# EAGLE board untitled (EAGLE 7.2.0)
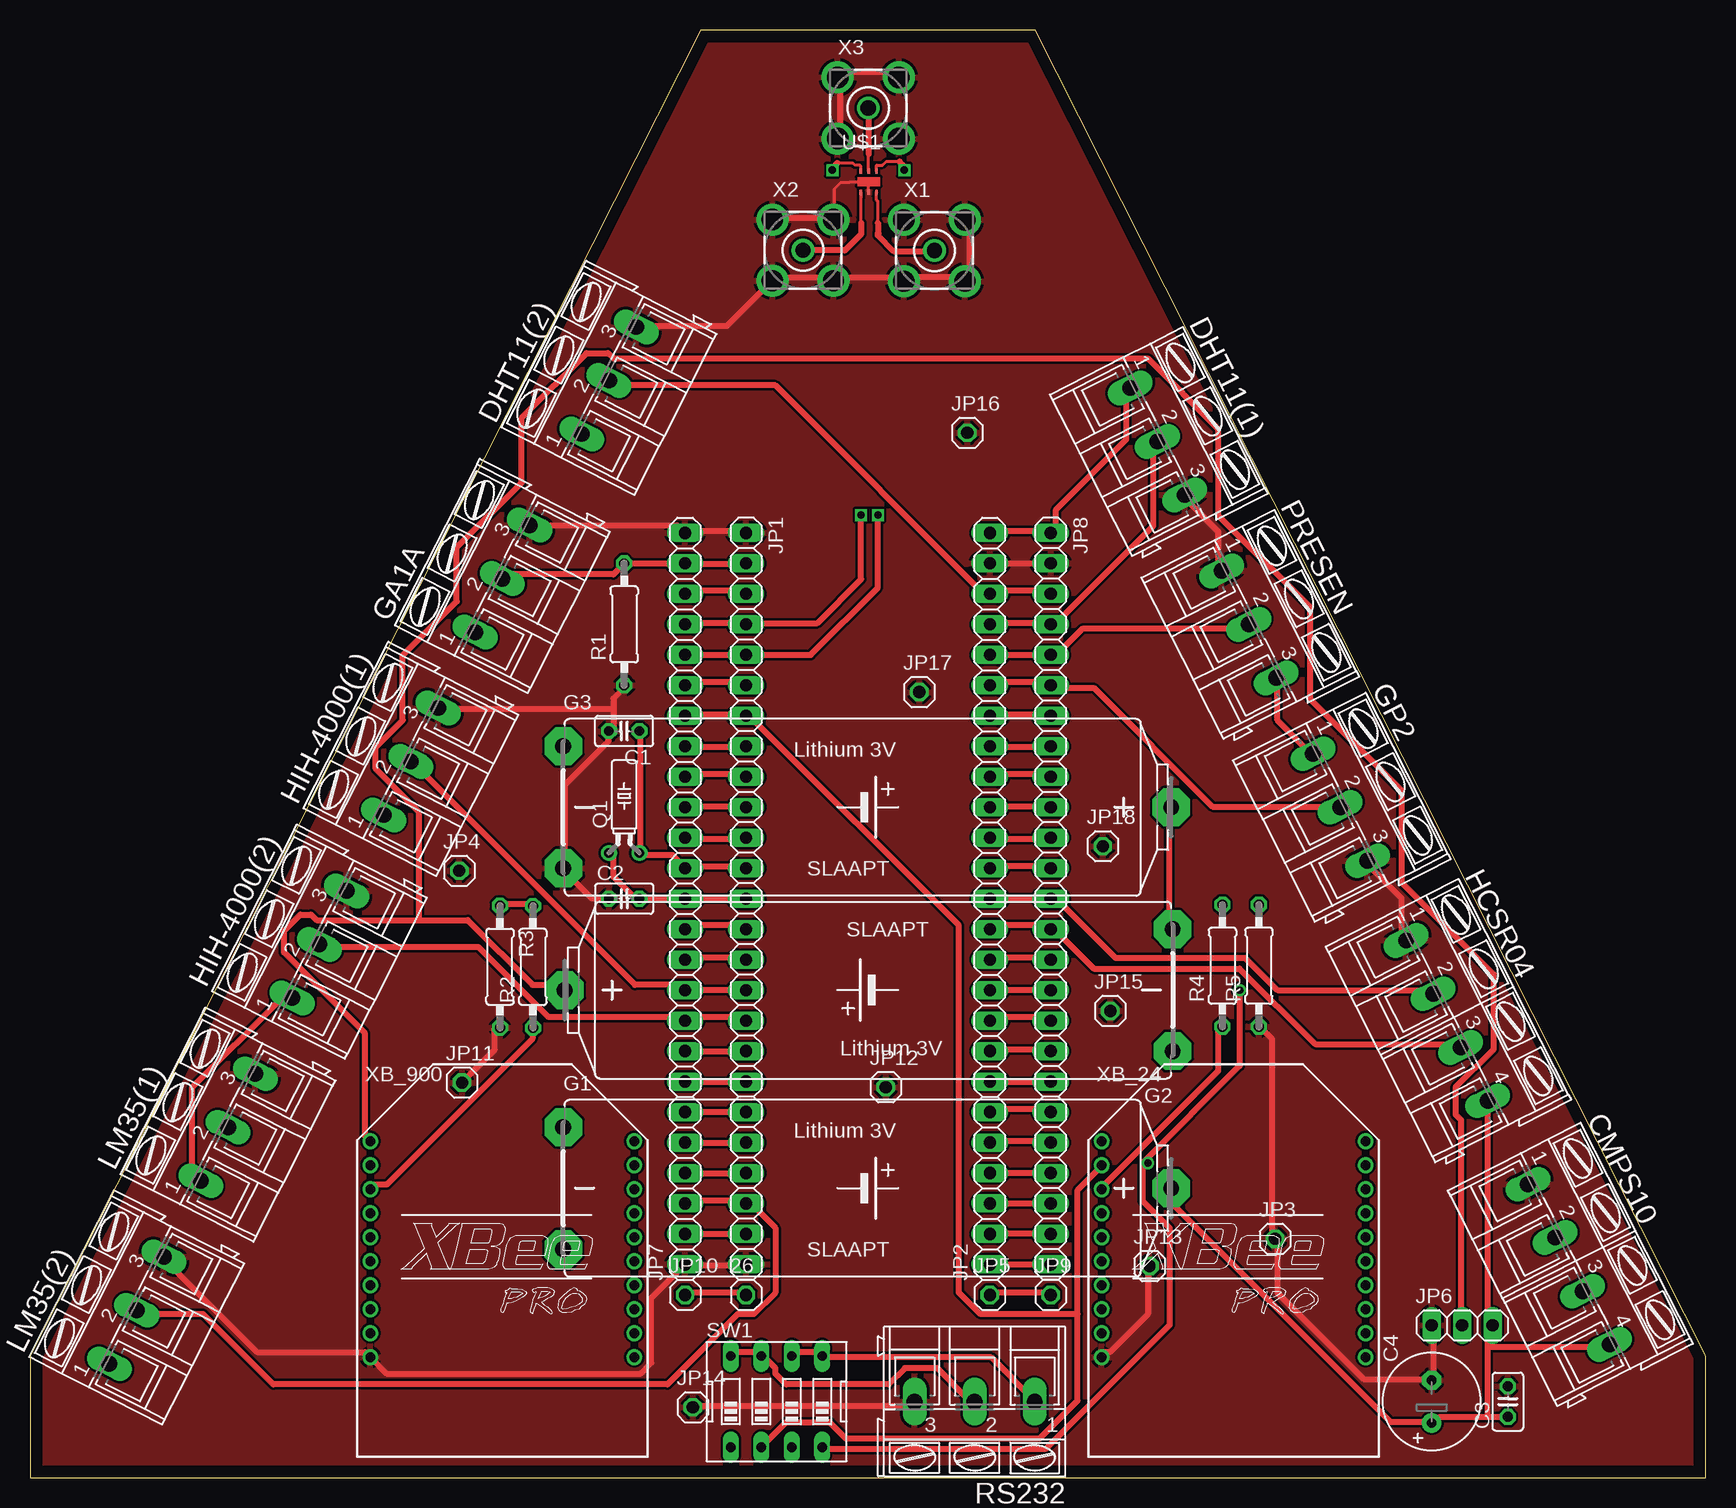
[diagram p0: board, top side]
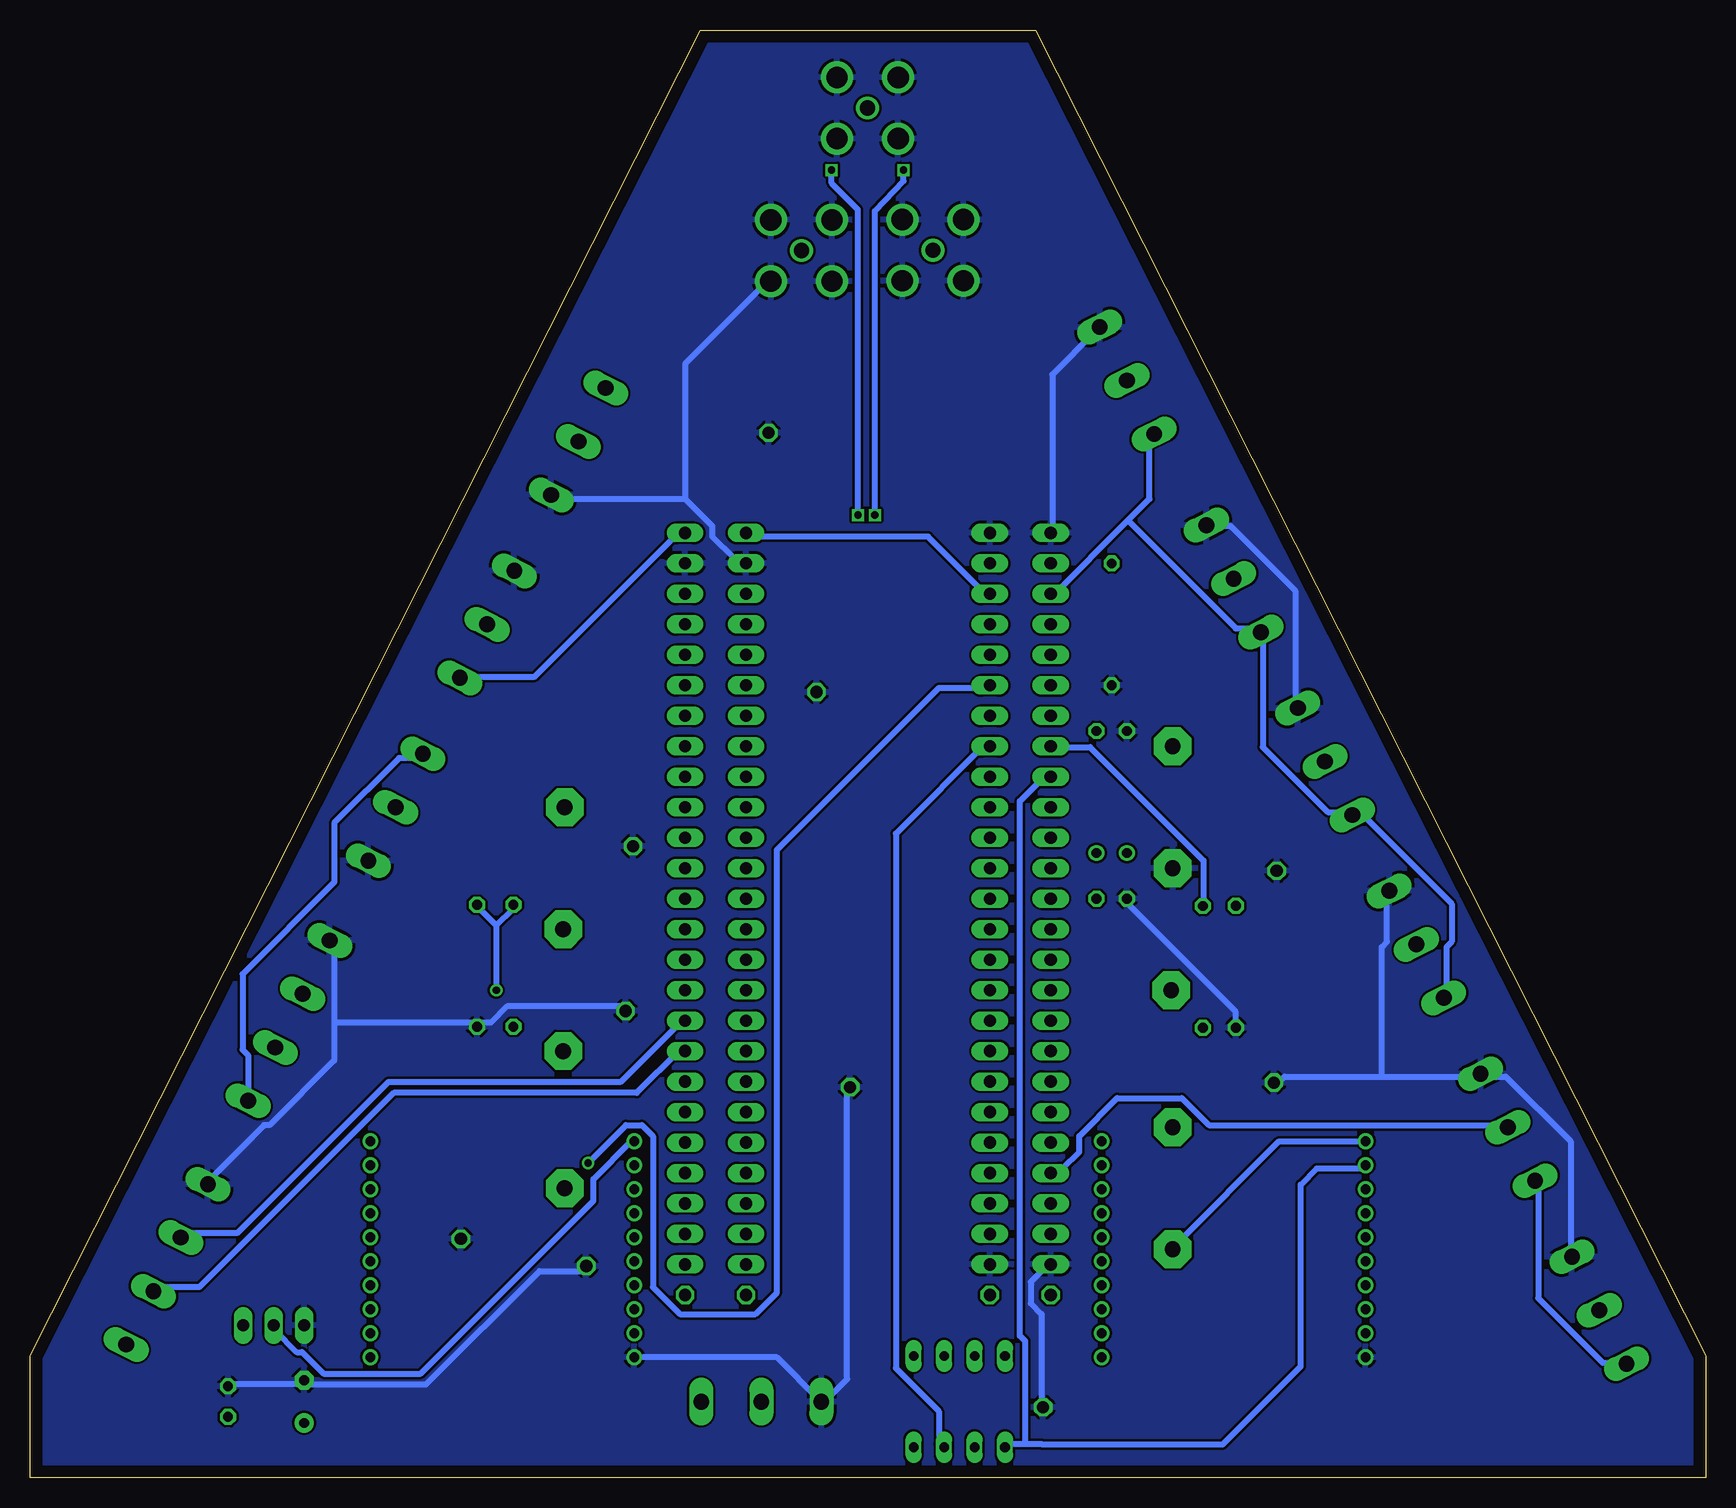
[diagram p1: board, bottom side, seen from below]

Size 139.7 x 120.65 mm. Coordinates in mm from the lower left corner, seen from the top.
Outline: 0,0 139.68,0 139.7,10.16 83.82,120.65 55.88,120.65 0,10.16 0,0
Copper layers (1*16): Top 0.035mm / dielectric 1.5mm / Bottom 0.035mm
Design rules "default": minimum track width 10mil, minimum drill 24mil, track to track 8mil, track to pad 8mil, pad to pad 8mil, via to via 8mil, smd to smd 8mil, copper to edge 40mil, drill to drill 8mil, minimum pad ring 10mil, minimum via ring 8mil, stop-mask expansion 4mil, vias tented up to drill 0mil, thermal gap 10mil

## Footprints (pad centres in the part's own frame; a part is rotated, then mirrored left to right if it is on the bottom)
1X01 = drill 1.016 octagon: 1 0,0
C025-025X050 = drill 0.813 octagon: 1 -1.27,0; 2 1.27,0
E3,5-8 = drill 0.813 pad 1.6: + -1.778,0 | drill 0.813 pad 1.6 octagon: - 1.778,0
AK300/4 = drill 1.321 long: 1 -7.493,0; 2 -2.515,0; 3 2.515,0; 4 7.493,0
AK300/3 = drill 1.321 long: 1 -5.004,0; 2 0,0; 3 5.004,0
SL-160AA/PT = drill 1.321 pad 3.15 octagon: + 25.273,0; - -25.4,-5.08; -@1 -25.4,5.08
1X25 = drill 1.016 long: 1 -29.21,0; 2 -26.67,0; 3 -24.13,0; 4 -21.59,0; 5 -19.05,0; 6 -16.51,0; 7 -13.97,0; 8 -11.43,0; 9 -8.89,0; 10 -6.35,0; 11 -3.81,0; 12 -1.27,0; 13 1.27,0; 14 3.81,0; 15 6.35,0; 16 8.89,0; 17 11.43,0; 18 13.97,0; 19 16.51,0; 20 19.05,0; 21 21.59,0; 22 24.13,0; 23 26.67,0; 24 29.21,0; 25 31.75,0
1X03 = drill 1.016 long: 1 -2.54,0; 2 0,0; 3 2.54,0
TC26H = drill 0.813: 1 -1.27,0; 2 1.27,0
0207/10 = drill 0.813 octagon: 1 -5.08,0; 2 5.08,0
EDG-04 = drill 0.813 long: 1 -3.81,-3.81; 2 -1.27,-3.81; 3 1.27,-3.81; 4 3.81,-3.81; 5 3.81,3.81; 6 1.27,3.81; 7 -1.27,3.81; 8 -3.81,3.81
SO70-6SPDT = smd 0.203 x 0.406: 1 -0.55,-0.85; 2 0.1,-0.85; 3 0.75,-0.85; 4 0.75,0.9; 5 0.1,0.9; P$6 -0.55,0.9
BU-SMA-V = drill 1.27: 1 0,0 | drill 1.778: 2 -2.55,2.55; 3 2.55,2.55; 4 2.55,-2.55; 5 -2.55,-2.55
XBEE-PRO = drill 0.8 pad 1.27: 1 -11,9; 2 -11,7; 3 -11,5; 4 -11,3; 5 -11,1; 6 -11,-1; 7 -11,-3; 8 -11,-5; 9 -11,-7; 10 -11,-9; 11 11,-9; 12 11,-7; 13 11,-5; 14 11,-3; 15 11,-1; 16 11,1; 17 11,3; 18 11,5; 19 11,7; 20 11,9

## Placement (x,y rotation side)
26  [1X01]  59.69,15.24 0 top
C1  10  [C025-025X050]  49.53,62.23 180 top
C2  10  [C025-025X050]  49.53,48.26 0 top
C3  [C025-025X050]  123.19,6.35 90 top
C4  [E3,5-8]  116.84,6.35 90 top
CMPS10  [AK300/4]  128.27,17.78 297 top
DHT11(1)  [AK300/3]  93.98,86.36 297 top
DHT11(2)  [AK300/3]  48.26,91.44 63 top
G1  SL-160AA/PT  [SL-160AA/PT]  69.85,24.13 0 top
G2  SL-160AA/PT  [SL-160AA/PT]  69.85,40.64 180 top
G3  SL-160AA/PT  [SL-160AA/PT]  69.85,55.88 0 top
GA1A  [AK300/3]  39.37,74.93 63 top
GP2  [AK300/3]  109.22,55.88 297 top
HCSR04  [AK300/4]  118.11,38.1 297 top
HIH-4000(1)  [AK300/3]  31.75,59.69 63 top
HIH-4000(2)  [AK300/3]  24.13,44.45 63 top
JP1  [1X25]  59.69,49.53 270 top
JP2  [1X25]  80.01,46.99 90 top
JP3  [1X01]  103.79,19.91 0 top
JP4  [1X01]  35.78,50.58 0 top
JP5  [1X01]  80.01,15.24 0 top
JP6  [1X03]  119.38,12.7 0 top
JP7  [1X25]  54.61,46.99 90 top
JP8  [1X25]  85.09,49.53 270 top
JP9  [1X01]  85.09,15.24 0 top
JP10  [1X01]  54.61,15.24 0 top
JP11  [1X01]  36.01,32.93 0 top
JP12  [1X01]  71.34,32.56 0 top
JP13  [1X01]  93.33,17.64 0 top
JP14  [1X01]  55.25,5.88 0 top
JP15  [1X01]  90.05,38.9 0 top
JP16  [1X01]  78.13,87.08 0 top
JP17  [1X01]  74.13,65.48 0 top
JP18  [1X01]  89.43,52.63 0 top
LM35(1)  [AK300/3]  16.51,29.21 63 top
LM35(2)  [AK300/3]  8.89,13.97 63 top
PRESEN  [AK300/3]  101.6,71.12 297 top
Q1  [TC26H]  49.53,52.07 0 top
R1  [0207/10]  49.53,71.12 90 top
R2  [0207/10]  41.93,42.57 90 top
R3  [0207/10]  39.18,42.59 270 top
R4  [0207/10]  99.4,42.67 90 top
R5  [0207/10]  102.44,42.67 90 top
RS232  [AK300/3]  78.74,6.35 180 top
SW1  [EDG-04]  62.23,6.35 0 top
U$1  SPDT  [SO70-6SPDT]  69.81,107.99 0 top
X1  BU-SMA-V  [BU-SMA-V]  75.39,102.27 0 top
X2  BU-SMA-V  [BU-SMA-V]  64.43,102.3 0 top
X3  BU-SMA-V  [BU-SMA-V]  69.88,114.15 0 top
XB_24  XBEE-PRO  [XBEE-PRO]  100.33,19.05 0 top
XB_900  XBEE-PRO  [XBEE-PRO]  39.37,19.05 0 top

## Library data of the parts
26 JP1-JP18 = pinhead
C1-C4 = rcl
CMPS10 DHT11(1) DHT11(2) GA1A GP2 HCSR04 HIH-4000(1) HIH-4000(2) LM35(1) LM35(2) PRESEN RS232 = con-ptr500; OC_FARNELL: unknown; OC_NEWARK: unknown
G1-G3 = battery
Q1 = crystal; OC_FARNELL: unknown; OC_NEWARK: unknown
R1-R5 = resistor
SW1 = special
U$1 = so70-6
X1-X3 = con-coax; OC_FARNELL: unknown; OC_NEWARK: unknown
XB_24 XB_900 = maxstream; MPN: XBP24-AWI-001; OC_FARNELL: 1337916; OC_NEWARK: 42M2667

## Nets
+3V3: G1.- G2.+ JP6.2 XB_24.1 XB_900.1
GND: C1.2 C2.1 C3.2 C4.- CMPS10.1 DHT11(1).3 DHT11(2).3 G3.- GA1A.3 GP2.3 HCSR04.1 HIH-4000(1).3 HIH-4000(2).3 JP1.1 JP1.25 JP2.24 JP3.1 JP4.1 JP6.1 JP7.1 JP7.25 JP8.2 JP11.1 JP12.1 JP13.1 JP14.1 JP15.1 JP16.1 JP17.1 JP18.1 LM35(1).3 LM35(2).3 PRESEN.1 R1.1 R3.2 R5.1 RS232.3 U$1.2 X1.2 X1.3 X1.4 X1.5 X2.2 X2.3 X2.4 X2.5 X3.2 X3.3 X3.4 X3.5 XB_24.10 XB_900.10
N$1: JP1.23 JP7.3 LM35(2).2
N$2: JP1.22 JP7.4 LM35(1).2
N$3: HIH-4000(2).2 JP1.17 JP7.9
N$4: CMPS10.2 JP2.9 JP8.17
N$5: GA1A.2 JP1.2 JP7.24 R1.2
N$6: C1.1 JP1.12 JP7.14 Q1.2
N$7: CMPS10.3 JP2.8 JP8.18
N$8: GP2.2 JP2.20 JP8.6
N$9: HCSR04.2 JP2.13 JP8.13
N$10: DHT11(2).2 JP2.23 JP8.3
N$11: DHT11(1).2 JP2.22 JP8.4
N$12: JP2.21 JP8.5 PRESEN.2
N$13: JP1.9 JP7.17 SW1.1 XB_900.2
N$14: HCSR04.3 JP2.12 JP8.14
N$15: JP1.8 JP7.18 R2.2 R3.1 SW1.3
N$16: JP1.6 JP7.20 R4.2 R5.2 SW1.4
N$17: JP1.7 JP7.19 SW1.2 XB_24.2
N$18: RS232.1 SW1.5 SW1.6
N$19: RS232.2 SW1.7 SW1.8
N$20: HIH-4000(1).2 JP1.16 JP7.10
N$21: G2.- G3.+
N$22: JP1.4 JP7.22 U$1.P$6
N$23: C2.2 JP1.13 JP7.13 Q1.1
N$24: 26.1 JP10.1
N$25: JP5.1 JP9.1
N$26: JP1.24 JP7.2
N$27: JP1.20 JP7.6
N$28: JP1.21 JP7.5
N$29: JP1.19 JP7.7
N$30: JP1.18 JP7.8
N$31: JP2.1 JP8.25
N$32: JP2.4 JP8.22
N$33: JP2.3 JP8.23
N$34: JP2.2 JP8.24
N$35: JP2.5 JP8.21
N$36: JP2.6 JP8.20
N$37: JP2.7 JP8.19
N$38: JP2.10 JP8.16
N$39: JP2.11 JP8.15
N$40: JP1.15 JP7.11
N$41: JP1.14 JP7.12
N$42: JP1.10 JP7.16
N$43: JP1.11 JP7.15
N$44: JP2.19 JP8.7
N$45: JP2.18 JP8.8
N$46: JP2.17 JP8.9
N$47: JP2.16 JP8.10
N$48: JP2.15 JP8.11
N$49: JP2.14 JP8.12
N$50: JP1.5 JP7.21 U$1.4
N$51: R2.1 XB_900.3
N$52: R4.1 XB_24.3
N$53: U$1.1 X2.1
N$54: U$1.3 X1.1
N$55: U$1.5 X3.1
VCC: C3.1 C4.+ CMPS10.4 DHT11(1).1 DHT11(2).1 G1.+ GA1A.1 GP2.1 HCSR04.4 HIH-4000(1).1 HIH-4000(2).1 JP1.3 JP2.25 JP6.3 JP7.23 JP8.1 LM35(1).1 LM35(2).1 PRESEN.3

## Tracks (layer width: path | path; a pad name or v marks a point on that pad's centre or on a via)
+3V3
  Top 0.5: 32.43,46.48 23.88,46.48 23.43,46.93 22.53,46.93 21.18,45.58 21.18,43.78 27.93,37.03 27.93,28.48 XB_900.1 | 32.43,46.48 36.48,46.48 41.88,41.08 44.13,41.08 G2.+ | 32.43,46.48 32.43,55.48 28.83,59.08 28.83,60.88 31.08,63.13 31.08,68.53 35.58,73.03 35.58,77.53 40.98,82.93 40.98,88.33 46.38,93.73 48.18,93.73 48.63,93.28 93.18,93.28 99.03,87.43 99.03,80.23 106.68,72.58 106.68,64.93 114.33,57.28 114.33,49.63 121.98,41.98 121.98,35.68 118.83,32.53 118.83,30.28 119.28,29.83 119.28,12.73 JP6.2
  Bottom 0.5: XB_24.1 89.58,28.03 92.73,24.88 92.73,23.08 107.13,8.68 115.23,8.68 117.03,10.48 117.48,10.48 119.28,12.28 JP6.2 | XB_900.1 28.38,28.03 35.58,28.03 44.13,19.48 G1.-
GND
  Top 0.254: U$1.2 69.91,107.95 69.88,107.98 68.38,107.98 68.33,107.93 67.58,107.93 67.03,107.38 67.03,104.9 X2.3
  Top 0.5: 59.43,17.68 54.93,17.68 JP7.1 54.48,17.68 51.78,14.98 51.78,9.58 50.88,8.68 29.73,8.68 28.38,10.03 XB_900.10 27.93,10.48 18.93,10.48 11.28,18.13 LM35(2).3 | XB_24.10 89.58,10.48 90.03,10.48 93.18,13.63 93.18,17.23 JP13.1 | JP14.1 55.38,5.98 73.38,5.98 RS232.3 | HCSR04.1 114.33,45.13 114.33,48.28 111.63,50.98 GP2.3 | JP6.1 117.03,12.28 117.03,8.23 C4.- 116.58,8.23 111.18,8.23 103.98,15.43 103.98,19.48 JP3.1 103.53,19.93 103.53,36.58 102.63,37.48 R5.1 | C2.1 48.18,48.28 46.83,48.28 44.58,50.53 G3.- 44.58,50.98 44.58,57.73 48.18,61.33 48.18,62.23 C1.2 48.63,62.23 48.63,64.03 | 48.63,64.03 48.63,64.93 49.53,65.83 R1.1 | 48.63,64.03 34.23,64.03 HIH-4000(1).3 | R3.2 38.73,37.48 38.73,35.68 36.03,32.98 JP11.1 | JP2.24 80.13,76.18 85.08,76.18 JP8.2 | PRESEN.1 99.03,75.73 99.03,78.88 96.33,81.58 DHT11(1).3 | JP1.1 59.43,78.88 54.93,78.88 JP7.25 54.48,78.88 54.03,79.33 41.88,79.33 GA1A.3 | 72.93,104.53 X1.2 | X1.3 78.33,104.53 78.33,100.03 X1.4 77.88,100.03 72.93,100.03 X1.5 72.48,100.03 67.08,100.03 X2.4 66.63,100.03 62.13,100.03 X2.5 61.68,99.58 58.08,95.98 50.88,95.98 DHT11(2).3 | 72.03,111.73 X3.4 | X3.3 72.03,117.13 67.53,117.13 X3.2 67.53,116.68 67.53,111.73 X3.5 | X2.2 62.13,104.98 66.63,104.98 X2.3 | 67.08,104.53 X2.3 | 67.08,104.98 X2.3
  Bottom 0.5: JP14.1 55.38,5.98 55.38,13.63 56.28,14.53 56.28,16.33 54.93,17.68 JP7.1 | JP12.1 71.58,32.53 71.58,8.23 73.38,6.43 RS232.3 73.83,6.43 77.43,10.03 89.13,10.03 XB_24.10 | 114.33,37.93 114.33,44.68 HCSR04.1 | 114.33,37.93 114.33,34.78 119.73,29.38 120.18,29.38 124.68,24.88 CMPS10.1 | C3.2 122.88,7.78 117.03,7.78 C4.- 116.58,7.78 106.68,7.78 97.23,17.23 93.63,17.23 JP13.1 | JP15.1 90.48,39.28 99.93,39.28 101.28,37.93 102.18,37.93 R5.1 102.63,37.93 114.33,37.93 | 27.03,33.43 35.13,33.43 35.58,32.98 JP11.1 | 27.03,33.43 18.93,33.43 LM35(1).3 18.48,33.43 16.68,33.43 11.28,28.03 11.28,18.58 LM35(2).3 | 27.03,33.43 27.03,44.23 26.58,44.68 26.58,48.73 HIH-4000(2).3 | C2.1 48.18,47.83 39.18,38.83 39.18,37.93 R3.2 | 85.08,81.58 82.83,79.33 82.83,78.43 81.03,76.63 80.13,76.63 JP2.24 | 85.08,81.58 95.88,81.58 DHT11(1).3 | JP7.25 54.48,78.88 54.48,91.93 50.88,95.53 DHT11(2).3 | 85.08,81.58 85.08,92.83 78.33,99.58 X1.4 | HIH-4000(1).3 34.23,64.48 34.23,73.93 39.63,79.33 41.43,79.33 GA1A.3
  pour Top: -0.02,10.18 -0.02,0.03 139.68,0.03 139.68,10.13 83.88,120.68 55.83,120.68 -0.07,10.13
  pour Bottom: -0.02,10.13 -0.02,0.03 139.68,0.03 139.68,10.23 83.83,120.63 55.88,120.63 -0.07,10.18
N$1
  Top 0.5: JP7.3 54.93,23.08 59.43,23.08 JP1.23 59.88,23.08 62.13,20.83 62.13,15.43 60.33,13.63 58.98,13.63 53.13,7.78 20.28,7.78 14.43,13.63 9.03,13.63 LM35(2).2
N$2
  Top 0.5: JP7.4 54.93,25.33 59.43,25.33 JP1.22
  Bottom 0.5: LM35(1).2 16.68,29.38 41.43,29.38 43.68,31.63 49.08,31.63 52.23,28.48 52.23,27.13 53.58,25.78 54.48,25.78 JP7.4
N$3
  Top 0.5: JP1.17 59.43,38.38 54.93,38.38 JP7.9 54.48,38.38 43.23,38.38 37.38,44.23 24.33,44.23 HIH-4000(2).2
N$4
  Top 0.5: JP2.9 80.13,38.38 85.08,38.38 JP8.17
  Bottom 0.5: CMPS10.2 126.93,20.38 122.43,20.38 109.83,32.98 90.48,32.98 85.53,37.93 JP8.17
N$5
  Top 0.5: 49.53,76.18 54.48,76.18 JP7.24 54.93,76.18 59.43,76.18 JP1.2 | 49.53,76.18 48.63,75.28 39.63,75.28 GA1A.2 | 49.53,76.18 R1.2
N$6
  Top 0.5: C1.1 50.88,62.23 50.88,52.33 Q1.2 50.88,51.88 53.58,51.88 54.48,50.98 JP7.14 54.93,50.98 59.43,50.98 JP1.12
N$7
  Top 0.5: JP2.8 80.13,35.68 85.08,35.68 JP8.18
  Bottom 0.5: CMPS10.3 129.18,15.88 125.58,15.88 109.38,32.08 89.13,32.08 85.53,35.68 JP8.18
N$8
  Top 0.5: JP2.20 80.13,66.28 85.08,66.28 JP8.6 85.53,65.83 88.68,65.83 98.58,55.93 108.93,55.93 GP2.2
N$9
  Top 0.5: JP2.13 80.13,48.28 85.08,48.28 JP8.13 85.53,48.28 90.48,43.33 101.28,43.33 103.98,40.63 116.58,40.63 HCSR04.2
N$10
  Top 0.5: JP8.3 85.08,73.93 80.13,73.93 JP2.23 79.68,73.48 62.13,91.03 48.63,91.03 DHT11(2).2
N$11
  Top 0.5: JP2.22 80.13,71.23 85.08,71.23 JP8.4 85.53,71.23 93.63,79.33 93.63,86.08 DHT11(1).2
N$12
  Top 0.5: JP2.21 80.13,68.53 85.08,68.53 JP8.5 85.53,68.53 87.78,70.78 101.28,70.78 PRESEN.2
N$13
  Top 0.5: JP7.17 54.93,58.63 59.43,58.63 JP1.9
  Bottom 0.5: 56.73,2.83 58.08,2.83 SW1.1 | 56.73,2.83 55.38,2.83 55.33,2.78 40.28,2.78 33.78,9.28 33.78,24.43 32.43,25.78 28.38,25.78 XB_900.2 | 56.73,2.83 56.73,11.38 57.18,11.83 57.18,56.38 55.38,58.18 54.93,58.18 JP7.17
N$14
  Top 0.5: JP2.12 80.13,46.03 85.08,46.03 JP8.14 85.53,45.58 88.68,42.43 100.83,42.43 107.13,36.13 118.83,36.13 HCSR04.3
N$15
  Top 0.5: R2.2 41.88,47.83 39.18,47.83 R3.1 | JP7.18 54.93,60.88 59.43,60.88 JP1.8
  Bottom 0.5: SW1.3 63.93,2.83 63.93,5.53 67.53,9.13 67.53,53.68 59.88,61.33 JP1.8 | R2.2 41.88,47.83 41.88,51.43 51.33,60.88 54.48,60.88 JP7.18
N$16  (via drill 0.61)
  Top 0.5: JP7.20 54.93,66.28 59.43,66.28 JP1.6 | 92.73,26.23 92.73,23.08 94.98,20.83 94.98,12.73 84.63,2.38 66.18,2.38 SW1.4 | 92.73,26.23 100.83,34.33 v100.83,40.63 | 92.73,26.23 v93.18,26.23
  Bottom 0.5: 100.83,46.03 v100.83,40.63 | 100.83,46.03 99.48,47.38 R4.2 | 100.83,46.03 102.18,47.38 R5.2 | v93.18,26.23 90.03,29.38 88.68,29.38 87.78,28.48 87.78,15.88 85.53,13.63 79.23,13.63 77.43,15.43 77.43,52.33 63.93,65.83 59.88,65.83 JP1.6
N$17
  Top 0.5: JP7.19 54.93,63.58 59.43,63.58 JP1.7 59.88,63.13 60.33,63.13 77.43,46.03 77.43,15.43 79.23,13.63 87.33,13.63 | 87.33,13.63 87.33,6.43 84.18,3.28 67.98,3.28 66.63,4.63 63.03,4.63 61.23,2.83 SW1.2 | 87.33,13.63 87.33,23.98 89.13,25.78 XB_24.2
N$18
  Top 0.5: SW1.6 63.93,10.48 65.73,10.48 SW1.5 66.18,10.03 80.13,10.03 83.73,6.43 RS232.1
N$19
  Top 0.5: SW1.8 58.53,10.48 60.78,10.48 SW1.7 61.23,10.03 62.13,9.13 62.13,8.68 63.03,7.78 71.58,7.78 72.93,9.13 75.63,9.13 78.33,6.43 RS232.2
N$20
  Top 0.5: JP1.16 59.43,40.63 54.93,40.63 JP7.10 54.48,41.08 50.43,41.08 31.98,59.53 HIH-4000(1).2
N$21
  Top 0.5: G3.+ 94.98,55.48 94.98,46.03 G2.-
N$22  (via drill 0.6)
  Top 0.254: 67.28,109.58 68.57,109.58 68.77,109.38 69.18,109.38 69.26,109.3 U$1.P$6
  Top 0.5: 59.43,71.23 54.93,71.23 JP7.22 | 59.43,71.23 JP1.4 | 59.43,71.23 65.63,71.23 69.28,74.88 v69.28,80.23 | v66.88,108.98 66.88,109.18 67.28,109.58
  Bottom 0.5: v69.28,80.23 69.28,105.58 66.88,108.08 v66.88,108.98
N$23
  Top 0.5: Q1.1 48.63,51.88 48.63,50.08 50.43,48.28 C2.2 50.88,48.28 54.48,48.28 JP7.13 54.93,48.28 59.43,48.28 JP1.13
N$24
  Top 0.5: JP10.1 54.93,15.43 59.43,15.43 26.1
N$25
  Top 0.5: JP5.1 80.13,15.43 85.08,15.43 JP9.1
N$26
  Top 0.5: JP7.2 JP1.24
N$27
  Top 0.5: JP1.20 JP7.6
N$28
  Top 0.5: JP7.5 JP1.21
N$29
  Top 0.5: JP7.7 54.93,32.98 59.43,32.98 JP1.19
N$30
  Top 0.5: JP7.8 JP1.18
N$31
  Top 0.5: JP2.1 JP8.25
N$32
  Top 0.5: JP8.22 JP2.4
N$33
  Top 0.5: JP2.3 JP8.23
N$34
  Top 0.5: JP8.24 JP2.2
N$35
  Top 0.5: JP2.5 80.13,28.03 85.08,28.03 JP8.21
N$36
  Top 0.5: JP2.6 80.13,30.73 85.08,30.73 JP8.20
N$37
  Top 0.5: JP2.7 80.13,32.98 85.08,32.98 JP8.19
N$38
  Top 0.5: JP2.10 80.13,40.63 JP8.16
N$39
  Top 0.5: JP2.11 80.13,43.33 85.08,43.33 JP8.15
N$40
  Top 0.5: JP7.11 54.93,43.33 59.43,43.33 JP1.15
N$41
  Top 0.5: JP7.12 54.93,46.03 59.43,46.03 JP1.14
N$42
  Top 0.5: JP7.16 54.93,55.93 59.43,55.93 JP1.10
N$43
  Top 0.5: JP7.15 54.93,53.23 59.43,53.23 JP1.11
N$44
  Top 0.5: JP2.19 80.13,63.58 85.08,63.58 JP8.7
N$45
  Top 0.5: JP2.18 80.13,60.88 85.08,60.88 JP8.8
N$46
  Top 0.5: JP2.17 80.13,58.63 85.08,58.63 JP8.9
N$47
  Top 0.5: JP2.16 80.13,55.93 85.08,55.93 JP8.10
N$48
  Top 0.5: JP2.15 80.13,53.23 85.08,53.23 JP8.11
N$49
  Top 0.5: JP2.14 80.13,50.98 85.08,50.98 JP8.12
N$50  (via drill 0.6)
  Top 0.254: 72.48,109.68 71.35,109.68 71.05,109.38 70.58,109.38 70.58,109.28 70.56,109.26 U$1.4
  Top 0.5: JP7.21 54.93,68.53 59.43,68.53 JP1.5 65.08,68.58 70.68,74.18 v70.68,80.23 | v72.88,108.98 72.88,109.28 72.48,109.68
  Bottom 0.5: v70.68,80.23 70.68,105.68 72.88,107.88 v72.88,108.98
N$51
  Top 0.5: XB_900.3 28.38,24.43 29.73,24.43 41.88,36.58 41.88,37.48 R2.1
N$52
  Top 0.5: XB_24.3 89.58,24.43 99.03,33.88 99.03,37.48 R4.1
N$53
  Top 0.254: 69.28,104.58 69.28,107.12 U$1.1
  Top 0.5: 69.28,104.58 69.28,103.63 67.93,102.28 64.45,102.28 X2.1
N$54
  Top 0.254: 70.68,104.58 70.68,106.38 70.58,106.48 70.58,107.12 U$1.3
  Top 0.5: 70.68,104.58 70.68,103.73 70.73,103.68 70.68,103.68 70.68,103.53 71.98,102.23 75.35,102.23 X1.1
N$55
  Top 0.254: U$1.5 69.91,110.31 69.93,110.33
  Top 0.5: 69.93,110.33 69.93,114.1 X3.1
N$62
  Top 0.254: 69.28,107.08 69.28,106.68
VCC
  Top 0.5: 121.53,5.08 117.48,5.08 117.03,4.63 C4.+ 116.58,4.63 113.43,4.63 95.43,22.63 95.43,23.98 G1.+ | 121.53,5.08 C3.1 | 121.53,5.08 121.53,10.93 | 121.53,10.93 121.53,12.28 JP6.3 121.53,12.73 121.53,31.18 HCSR04.4 | 121.53,10.93 131.43,10.93 CMPS10.4 | PRESEN.3 103.98,66.28 103.98,63.13 106.68,60.43 GP2.1 | JP2.25 80.13,78.88 85.08,78.88 JP8.1 85.53,78.88 85.53,80.68 91.38,86.53 91.38,90.58 DHT11(1).1 | HIH-4000(2).1 21.63,39.73 20.73,39.73 13.53,32.53 13.53,25.33 13.98,24.88 LM35(1).1 | JP7.23 54.93,73.93 59.43,73.93 JP1.3
  Bottom 0.5: PRESEN.3 103.53,66.73 97.68,66.73 85.53,78.88 JP8.1 | LM35(2).1 6.78,9.58 8.58,9.58 13.98,14.98 13.98,24.43 LM35(1).1 | 48.18,79.78 54.48,73.48 JP7.23 | 48.18,79.78 46.38,81.58 46.38,86.98 DHT11(2).1 | 48.18,79.78 39.18,70.78 37.38,70.78 GA1A.1 36.93,70.33 36.93,60.88 31.53,55.48 29.73,55.48 HIH-4000(1).1 29.28,55.03 28.38,55.03 21.18,47.83 21.18,44.68 21.63,44.23 21.63,40.18 HIH-4000(2).1 | JP2.25 79.68,78.43 64.83,78.43 59.88,73.48 JP1.3 | HCSR04.4 121.53,31.63 121.53,35.23 121.98,35.68 121.98,41.98 114.33,49.63 114.33,54.58 108.93,59.98 107.13,59.98 GP2.1